# EAGLE board untitled (EAGLE 9.3.0)
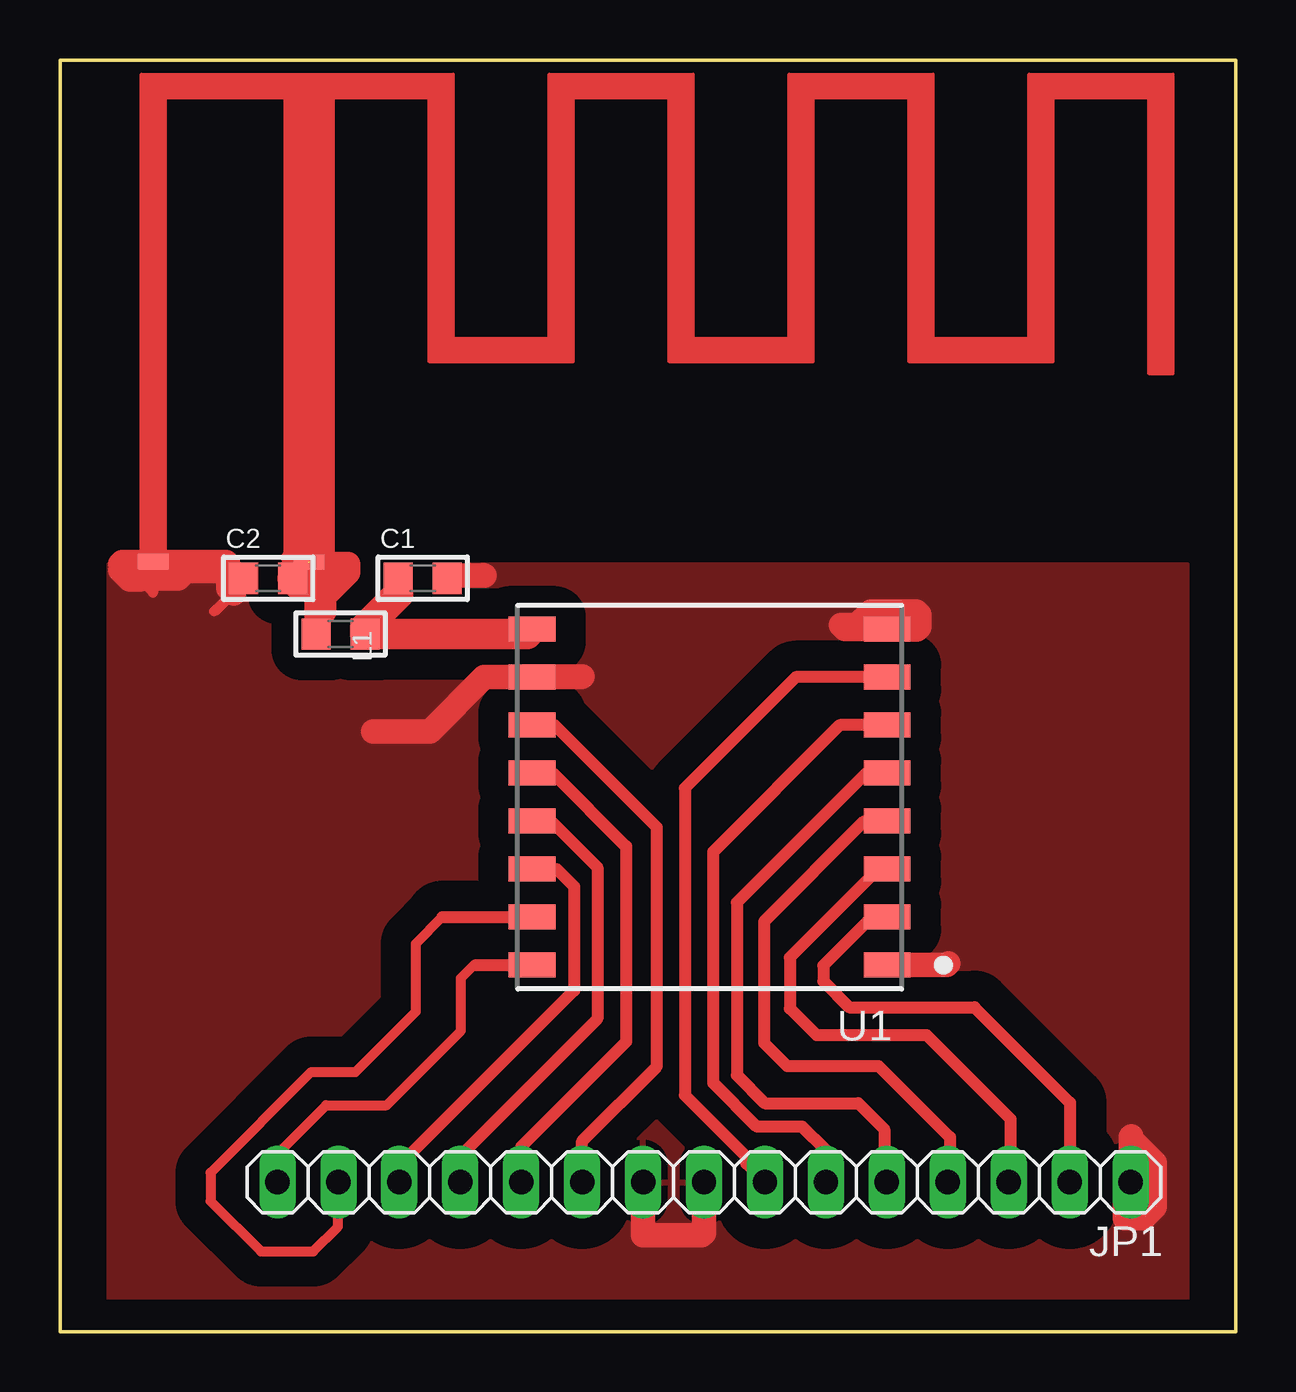
[diagram p0: board, top side]

Size 49 x 53 mm. Coordinates in mm from the lower left corner, seen from the top.
Outline: 0,0 49,0 49,53 0,53 0,0
Copper layers (1*16): Top 0.035mm / dielectric 1.5mm / Bottom 0.035mm
Design rules "default *": minimum track width 6mil, minimum drill 0.35mm, track to track 6mil, track to pad 6mil, pad to pad 6mil, via to via 6mil, smd to smd 6mil, copper to edge 40mil, drill to drill 6mil, minimum pad ring 10mil, minimum via ring 8mil, stop-mask expansion 4mil, vias tented up to drill 0mil, thermal gap 10mil

## Footprints (pad centres in the part's own frame; a part is rotated, then mirrored left to right if it is on the bottom)
C0805 = smd 1.2 x 1.3: 1 -1.016,0; 2 1.016,0
1X15 = drill 1.016 long: 1 -17.78,0; 2 -15.24,0; 3 -12.7,0; 4 -10.16,0; 5 -7.62,0; 6 -5.08,0; 7 -2.54,0; 8 0,0; 9 2.54,0; 10 5.08,0; 11 7.62,0; 12 10.16,0; 13 12.7,0; 14 15.24,0; 15 17.78,0
L0805 = smd 1.2 x 1.3: 1 -1.016,0; 2 1.016,0
XCVR_RFM95W-868S2 = smd 1.95 x 1.05: 1 -7.4,7; 2 -7.4,5; 3 -7.4,3; 4 -7.4,1; 5 -7.4,-1; 6 -7.4,-3; 7 -7.4,-5; 8 -7.4,-7; 9 7.4,-7; 10 7.4,-5; 11 7.4,-3; 12 7.4,-1; 13 7.4,1; 14 7.4,3; 15 7.4,5; 16 7.4,7
868 = smd 1.27 x 0.635: P$1 0.501,-0.328; P$2 6.987,-0.338

## Placement (x,y rotation side)
C1  [C0805]  15.12,31.4 0 top
C2  [C0805]  8.68,31.4 0 top
JP1  [1X15]  26.85,6.23 180 top
L1  L_0805  [L0805]  11.7,29.07 180 top
U1  RFM95W-868S2  [XCVR_RFM95W-868S2]  27.08,22.28 180 top
U$1  868  [868]  3.39,32.41 0 top

## Library data of the parts
C1 C2 L1 = rc-master-smd
JP1 = pinhead
U1 = RFM95W-868S2; AVAILABILITY: Unavailable; DESCRIPTION: General ISM < 1GHz LoRa™ Transceiver Module 868MHz Antenna Not Included Surface Mount; MF: RF; MP: RFM95W-868S2; PACKAGE: SMD-16 Hope Microelectronics; PRICE: None
U$1 = 868

## Nets
GND: C1.2 C2.1 JP1.1 JP1.8 JP1.9 U1.1 U1.8 U1.10 U$1.P$1
N$1: C2.2 L1.2 U$1.P$2
N$2: C1.1 L1.1 U1.9
N$17: JP1.2 U1.2
N$18: JP1.3 U1.3
N$19: JP1.4 U1.4
N$20: JP1.5 U1.5
N$21: JP1.6 U1.6
N$22: JP1.7 U1.7
N$25: JP1.10 U1.11
N$26: JP1.11 U1.12
N$27: JP1.12 U1.13
N$28: JP1.13 U1.14
N$29: JP1.14 U1.15
N$30: JP1.15 U1.16

## Tracks (layer width: path | path; a pad name or v marks a point on that pad's centre or on a via)
GND
  Top 0.406: C2.1 | C2.1 4.93,31.39 | 4.93,31.39 4.58,31.39 | 4.58,31.39 4.31,31.67 | 4.31,31.67 3.98,31.99 | 3.89,31.99 3.98,31.99 | U$1.P$1 4,32.19 5.61,32.19 5.21,31.79 5.14,31.71 | 5.14,31.71 4.94,31.51 | 4.94,31.51 4.93,31.5 4.93,31.39 | U$1.P$1 3.81,32.17 2.51,32.17 2.51,32 2.51,31.74 2.8,31.74 | 4.31,31.67 4.03,31.39 | 3.43,31.25 3.88,30.8 3.88,31.25 4.03,31.39 | 3.43,31.25 3.34,31.34 3.09,31.59 | 3.09,31.59 3.08,31.6 | 3.08,31.6 2.94,31.74 2.8,31.74 | U$1.P$1 3.89,31.72 3.43,31.25 | U$1.P$1 4.37,32.08 4.94,31.51 | U$1.P$1 4.77,32.08 5.14,31.71 | U$1.P$1 3.4,31.59 3.09,31.59 | U$1.P$1 3.56,32.08 3.08,31.6 | 3.14,32.08 3.13,32.08 | 3.13,32.08 2.8,31.74 | U$1.P$1 3.52,32.08 3.14,31.7 | 2.66,31.23 3.14,31.7 | 3.14,31.7 3.14,32.07 3.13,32.08 | U$1.P$1 3.98,31.99 | 4.58,31.39 4.03,31.39 | C2.1 7.66,31.2 7.23,30.77 6.52,30.06 6.49,30.08 | 6.49,30.08 | 6.49,30.1 6.49,30.08 | 6.49,30.08 6.42,30.01 | 6.49,30.08 7.66,31.25 C2.1
  Top 0.508: U1.10 19.82,27.13
  Top 1.016: 2.59,32.08 U$1.P$1 6.92,32.08 7,32 7,31 7.23,30.77 | 2.59,32.08 2.51,32 | 3.28,31.39 3.34,31.34 | 3.34,31.34 | 3.34,31.34 2.92,31.34 2.51,31.74 | 2.59,32.08 3.28,31.39 | 3.28,31.39 4.93,31.39 5.21,31.68 5.21,31.79 | C1.2 16.25,31.52 17.64,31.52 | 17.69,31.52 17.64,31.52 | 17.64,31.52 17.63,31.53 | 37.04,15.35 36.97,15.28 U1.1 | U1.10 21.74,27.27 21.77,27.31 19.71,27.31 U1.10 | U1.10 17.67,27.27 15.42,25.02 13.06,25.02 | JP1.8 26.84,4.1 26.74,4 24.3,4 24.3,6.22 JP1.9 | U1.8 32.72,29.27 32.56,29.44 33.23,29.44 33.81,30.02 35.7,30.02 35.83,29.89 35.83,29.36 35.73,29.26 34.49,29.26 U1.8 | JP1.1 44.62,8.11 44.65,8.14 44.65,8.01 45.63,7.03 45.63,5.19 45.16,4.71 44.38,4.71 44.38,5.99 JP1.1
  pour Top (isolate 1.27): 2,1 47,1 47,32 2,32
N$1  (1 unrouted)
  Top 0.406: 10.35,32.04 10.35,31.75
  Top 1: L1.2 10.68,32.48 10.38,32.78 | 9.69,31.53 C2.2
  Top 1.016: 9.94,31.15 C2.2 9.98,31.69 10.35,31.69 10.38,31.69 | 10.38,31.18 10.38,31.69 | 10.38,31.69 10.38,32.78 | 11,30.64 11,30 | 11,30.64 11,31.39 10.71,31.69 10.38,31.69 | 9.75,32.23 9.9,32.07 U$1.P$2 10.45,32 12,32 12,31.64 11,30.64
  Top 1.27: C2.2 9.75,31.34 | 9.94,31.15 10.34,31.56 10.38,31.56 10.38,31.18 10.39,31.16
N$2
  Top 0.61: 19.48,29.07 U1.9
  Top 1: 14.1,30.72 C1.1
  Top 1.27: 19.48,29.07 L1.1 12.71,29.34 14.1,30.72
N$17
  Top 0.508: 33.93,17.27 U1.2 33.84,17.27 31.82,15.26 31.82,14.6 32.9,13.52 38.12,13.52 42.09,9.54 42.09,6.25 42.08,6.24 JP1.2
N$18
  Top 0.508: U1.3 34.12,19.27 30.43,15.58 30.43,13.46 31.54,12.36 36.12,12.36 39.62,8.86 39.62,6.53 39.43,6.34 JP1.3
N$19
  Top 0.508: U1.4 33.54,21.27 29.36,17.09 29.36,12.02 30.32,11.05 34.13,11.05 37.09,8.1 37.09,6.31 JP1.4
N$20
  Top 0.508: U1.5 33.6,23.27 28.21,17.88 28.21,10.68 29.38,9.52 33.27,9.52 34.35,8.44 34.35,6.33 JP1.5 34.47,6.28
N$21
  Top 0.508: U1.6 32.51,25.27 27.23,20 27.23,10.36 29.05,8.54 30.93,8.54 31.93,7.54 JP1.6 31.73,6.22
N$22
  Top 0.508: U1.7 30.67,27.27 26.04,22.65 26.04,9.84 28.61,7.28 28.61,7 JP1.7
N$25
  Top 0.508: U1.11 20.62,25.27 24.88,21.02 24.88,11.06 21.77,7.95 JP1.10
N$26
  Top 0.508: JP1.11 19.23,7.71 23.6,12.08 23.6,20.23 20.55,23.27 U1.12
N$27
  Top 0.406: U1.13 20.47,21.27
  Top 0.508: 20.47,21.27 22.4,19.35 22.4,13.03 16.78,7.42 16.64,7.42 16.64,6.28 JP1.12
N$28
  Top 0.508: U1.14 20.7,19.27 21.43,18.54 21.43,14.21 14.14,6.92 JP1.13
N$29
  Top 0.406: 15.94,17.27 14.84,16.18 14.84,13.34 12.31,10.81 10.47,10.81 6.28,6.62 6.28,5.43 8.38,3.33 10.56,3.33 11.59,4.37 11.59,6.21 JP1.14
  Top 0.508: 11.61,6.76 JP1.14 11.6,6.21 | 15.94,17.27 U1.15
N$30
  Top 0.406: JP1.15 9.06,7.41 11.09,9.44 13.62,9.44 16.71,12.54 16.71,14.73 17.25,15.28 17.34,15.28
  Top 0.508: JP1.15 9.06,7 | 17.34,15.28 U1.16